# EAGLE board gate_board v2 (EAGLE 9.7.0)
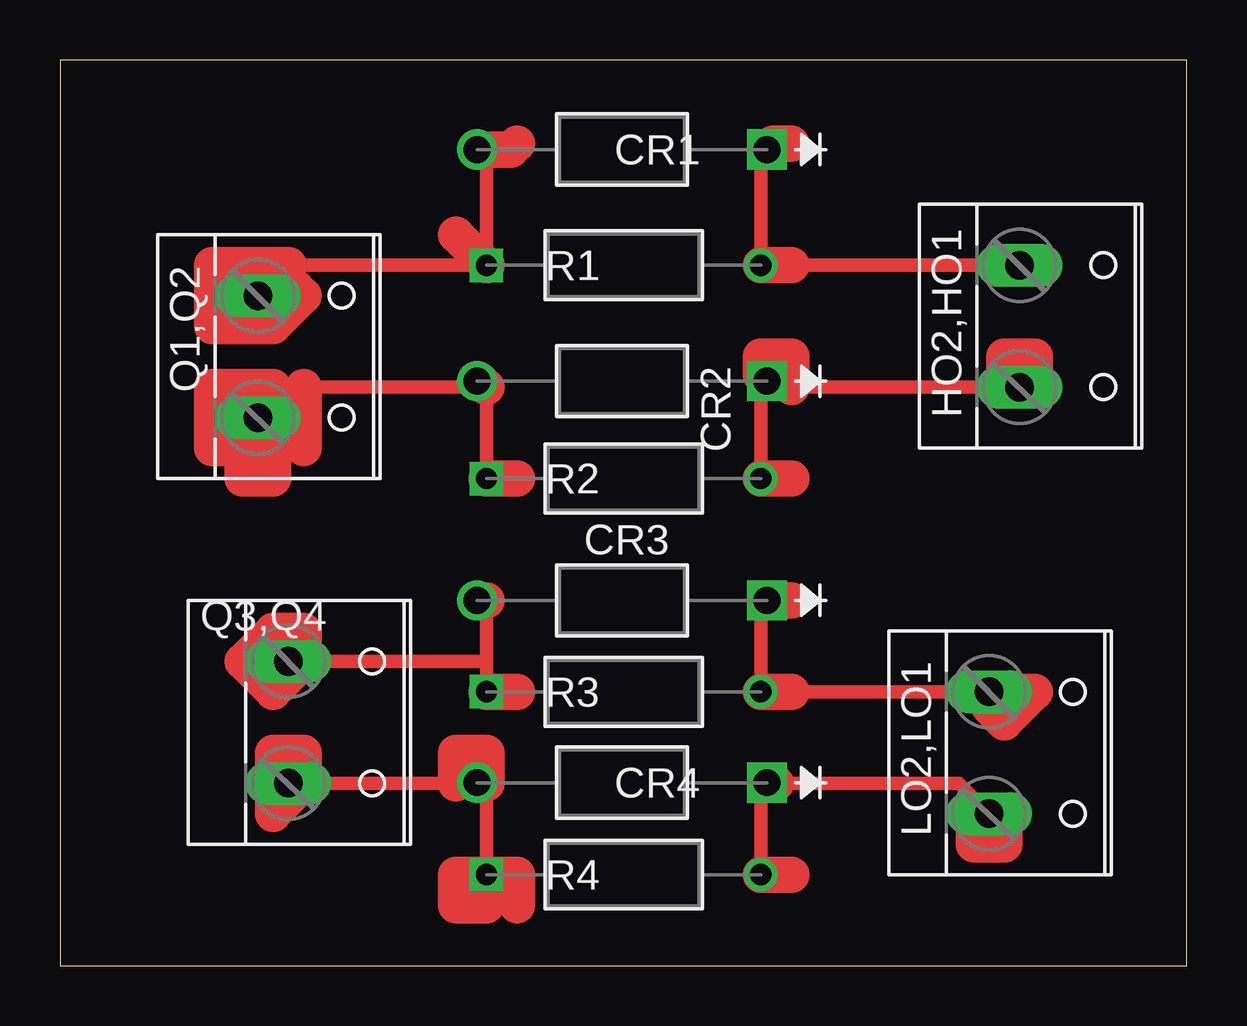
[diagram p0: board, top side]

Size 46.97 x 37.77 mm. Coordinates in mm from the lower left corner, seen from the top.
Outline: 0,0 46.97,0 46.97,37.77 0,37.77 0,0
Copper layers (1*16): Top 0.035mm / dielectric 1.5mm / Bottom 0.035mm
Design rules "Fusion Electronics Design Rules": minimum track width 22mil, minimum drill 0.35mm, track to track 24mil, track to pad 24mil, pad to pad 6mil, via to via 6mil, smd to smd 6mil, copper to edge 40mil, drill to drill 6mil, minimum pad ring 10mil, minimum via ring 8mil, stop-mask expansion 4mil, vias tented up to drill 9999mil, thermal gap 10mil

## Footprints (pad centres in the part's own frame; a part is rotated, then mirrored left to right if it is on the bottom)
CR_1N4005_ONS = drill 1.118 pad 1.626 square: 1 0,0 | drill 1.118 pad 1.626: 2 12.08,0
W237-132 = drill 1.194 long: 1 -2.54,-0.635; 2 2.54,-0.635
STA_CF14_STP = drill 0.889 pad 1.397 square: 1 0,0 | drill 0.889 pad 1.397: 2 11.43,0

## Placement (x,y rotation side)
CR1  1N4007CR_1N4005_ONS  [CR_1N4005_ONS]  29.46,34.04 180 top
CR2  1N4007CR_1N4005_ONS  [CR_1N4005_ONS]  29.46,24.38 180 top
CR3  1N4007CR_1N4005_ONS  [CR_1N4005_ONS]  29.46,15.24 180 top
CR4  1N4007CR_1N4005_ONS  [CR_1N4005_ONS]  29.46,7.64 180 top
HO2,HO1  [W237-132]  40.64,26.67 270 top
LO2,LO1  [W237-132]  39.37,8.89 270 top
Q1,Q2  [W237-132]  8.89,25.4 270 top
Q3,Q4  [W237-132]  10.16,10.16 270 top
R1  CF14JT10K0STA_CF14_STP  [STA_CF14_STP]  17.78,29.21 0 top
R2  CF14JT10K0STA_CF14_STP  [STA_CF14_STP]  17.78,20.32 0 top
R3  CF14JT10K0STA_CF14_STP  [STA_CF14_STP]  17.78,11.43 0 top
R4  CF14JT10K0STA_CF14_STP  [STA_CF14_STP]  17.78,3.81 0 top

## Library data of the parts
CR1-CR4 = 2024-12-05_04-23-24_Library; COPYRIGHT: Copyright (C) 2024 Ultra Librarian. All rights reserved.; MANUFACTURER_PART_NUMBER: 1N4007; MFR_NAME: onsemi
HO2,HO1 LO2,LO1 Q1,Q2 Q3,Q4 = con-wago-508
R1-R4 = 2024-12-04_14-13-54_Library; COPYRIGHT: Copyright (C) 2024 Ultra Librarian. All rights reserved.; MANUFACTURER_PART_NUMBER: CF14JT10K0; MFR_NAME: Stackpole International

## Nets
N$1: CR1.2 Q1,Q2.1 R1.1
N$2: CR1.1 HO2,HO1.1 R1.2
N$3: CR2.2 Q1,Q2.2 R2.1
N$4: CR2.1 HO2,HO1.2 R2.2
N$5: CR3.2 Q3,Q4.1 R3.1
N$6: CR3.1 LO2,LO1.1 R3.2
N$7: CR4.2 Q3,Q4.2 R4.1
N$8: CR4.1 LO2,LO1.2 R4.2

## Tracks (layer width: path | path; a pad name or v marks a point on that pad's centre or on a via)
N$1
  Top 0.559: CR1.2 17.78,33.66 R1.1 9.53,29.21 8.57,28.26 Q1,Q2.1
  Top 1.524: 9.53,29.21 6.35,29.21 6.35,26.67 8.89,26.67 10.16,27.94 9.84,28.26 8.57,28.26 | R1.1 16.51,30.48 | CR1.2 18.8,34.04 19.05,34.29
N$2
  Top 0.559: R1.2 29.21,33.66 CR1.1 | 39.37,29.21 30.48,29.21
  Top 1.524: CR1.1 29.72,34.29 30.48,34.29 | R1.2 30.48,29.21 | 40.64,29.21 HO2,HO1.1 39.37,29.21
N$3
  Top 0.559: 17.78,24.13 R2.1 | 10.16,24.13 17.15,24.13 CR2.2
  Top 1.524: 10.16,24.13 10.16,21.59 8.89,22.86 Q1,Q2.2 6.99,21.59 6.35,21.59 6.35,24.13 8.89,24.13 8.89,20.32 7.62,20.32 7.62,21.59 | R2.1 19.05,20.32 | CR2.2 17.53,24.38 17.78,24.13
N$4
  Top 0.559: R2.2 29.21,24.13 CR2.1 | 39.37,24.13 30.48,24.13
  Top 1.524: R2.2 30.48,20.32 | CR2.1 29.21,24.64 29.21,25.4 30.48,25.4 30.48,24.13 | HO2,HO1.2 40.64,24.13 40.64,25.4 39.37,25.4 39.37,24.13
N$5
  Top 0.559: 17.78,15.24 17.78,12.7 | 17.78,12.7 R3.1 | 10.16,12.7 17.78,12.7
  Top 1.524: Q3,Q4.1 10.16,13.34 10.16,13.97 8.89,13.97 7.62,12.7 8.89,11.43 10.16,12.7 | R3.1 19.05,11.43 | CR3.2 17.78,15.24
N$6
  Top 0.559: R3.2 29.21,15.24 CR3.1 | 30.48,11.43 LO2,LO1.1
  Top 1.524: R3.2 30.48,11.43 | CR3.1 30.48,15.24 | LO2,LO1.1 38.73,10.8 39.37,10.16 40.64,11.43 LO2,LO1.1
N$7
  Top 0.559: 17.78,7.62 R4.1 | 10.16,7.62 16.51,7.62 17.15,7.62 CR4.2
  Top 1.524: Q3,Q4.2 10.16,8.26 10.16,8.89 8.89,8.89 8.89,6.35 10.16,7.62 | R4.1 17.78,2.54 16.51,2.54 16.51,3.81 19.05,3.81 19.05,2.54 | CR4.2 17.41,7.62 17.78,7.62 17.78,8.89 16.51,8.89 16.51,7.62
N$8
  Top 0.559: R4.2 29.21,7.62 CR4.1 | LO2,LO1.2 37.47,7.62 29.84,7.62
  Top 1.524: LO2,LO1.2 39.37,6.35 39.37,5.08 38.1,5.08 38.1,6.35 | R4.2 30.48,3.81 | CR4.1 29.82,7.64 29.84,7.62